# EAGLE board object_0 (EAGLE 9.0.0)
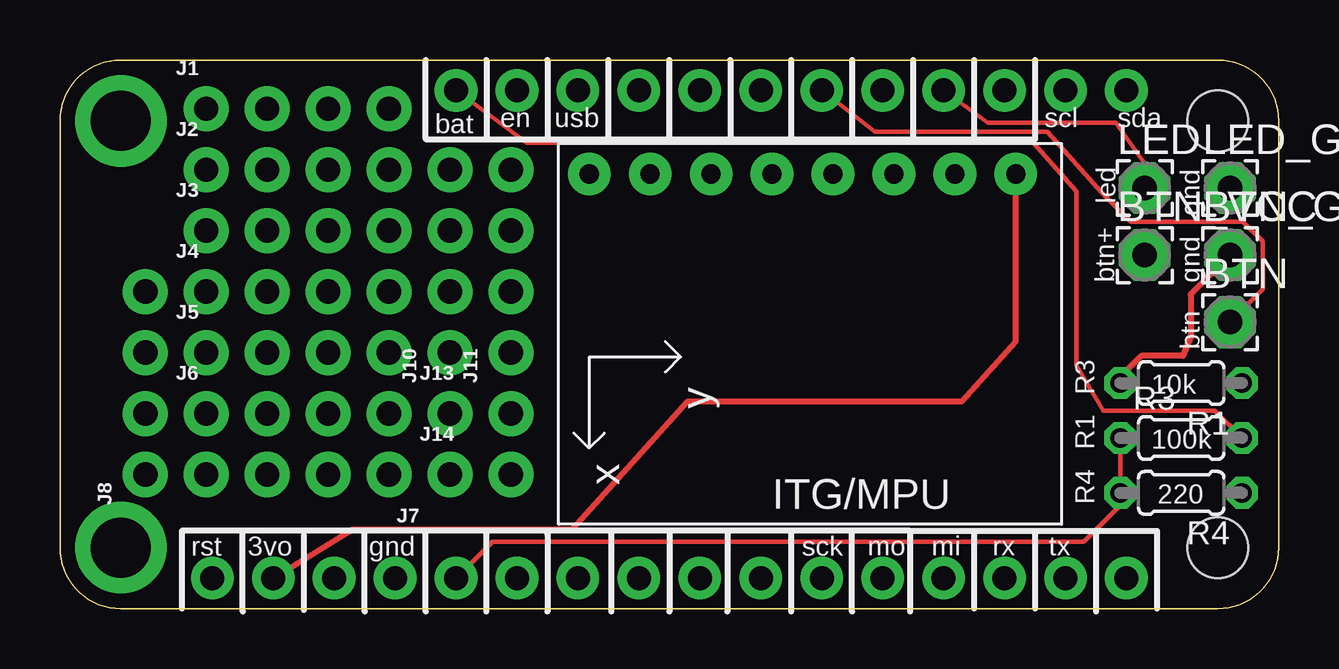
[diagram p0: board, top side]
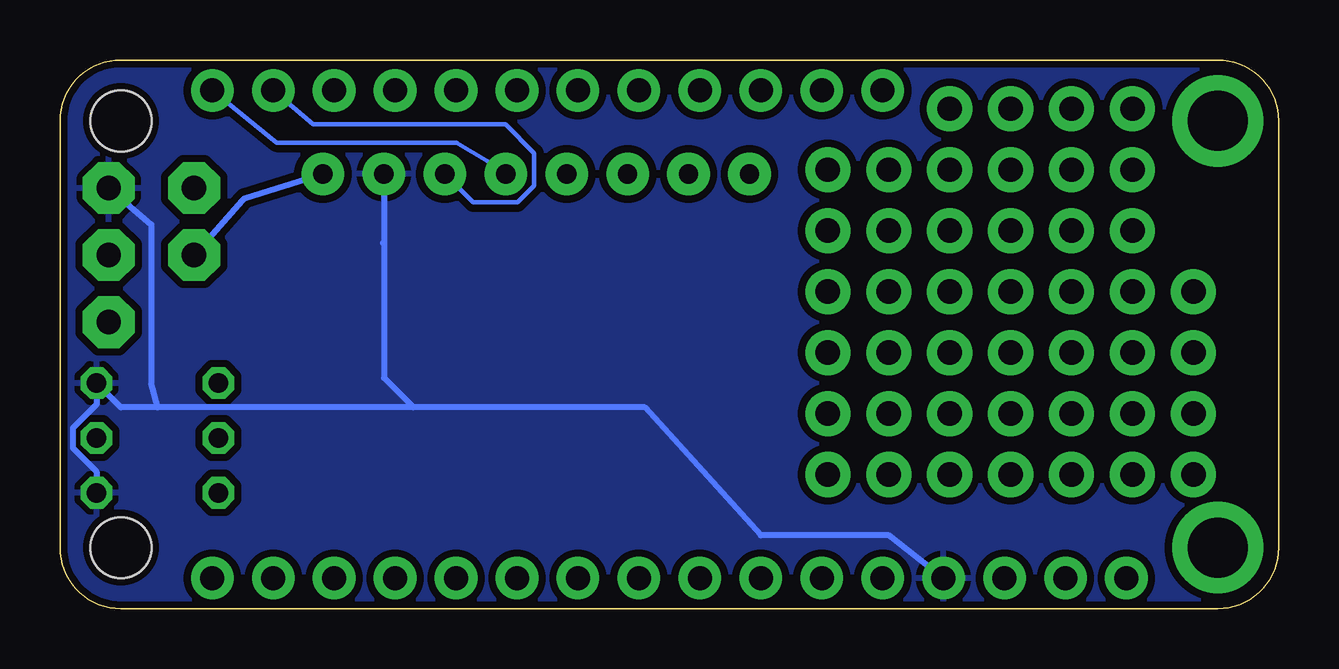
[diagram p1: board, bottom side, seen from below]

Size 50.8 x 22.86 mm. Coordinates in mm from the lower left corner, seen from the top.
Outline: 2.54,22.86 48.26,22.86 arc-90 50.8,20.32 50.8,2.54 arc-90 48.26,0 2.54,0 arc-90 0,2.54 0,20.32 arc-90 2.54,22.86
Copper layers (1*16): Top 0.035mm / dielectric 1.5mm / Bottom 0.035mm
Design rules "adafruit *": minimum track width 7mil, minimum drill 0.3mm, track to track 8mil, track to pad 8mil, pad to pad 8mil, via to via 8mil, smd to smd 8mil, copper to edge 10mil, drill to drill 8mil, minimum pad ring 10mil, minimum via ring 8mil, stop-mask expansion 2mil, vias tented up to drill 20mil, thermal gap 10mil

## Footprints (pad centres in the part's own frame; a part is rotated, then mirrored left to right if it is on the bottom)
2,15/1,0 = drill 1.016 pad 2.159 octagon: 1 0,0
1X04_NO_SILK = drill 1.016 pad 1.88: 1 0,0; 2 2.54,0; 3 5.08,0; 4 7.62,0
1X02_NO_SILK = drill 1.016 pad 1.88: 1 0,0; 2 2.54,0
FEATHERWING = drill 1 pad 1.778: 1 6.35,1.27; 2 8.89,1.27; 3 11.43,1.27; 4 13.97,1.27; 5 16.51,1.27; 6 19.05,1.27; 7 21.59,1.27; 8 24.13,1.27; 9 26.67,1.27; 10 29.21,1.27; 11 31.75,1.27; 12 34.29,1.27; 13 36.83,1.27; 14 39.37,1.27; 15 41.91,1.27; 16 44.45,1.27; 17 44.45,21.59; 18 41.91,21.59; 19 39.37,21.59; 20 36.83,21.59; 21 34.29,21.59; 22 31.75,21.59; 23 29.21,21.59; 24 26.67,21.59; 25 24.13,21.59; 26 21.59,21.59; 27 19.05,21.59; 28 16.51,21.59 | drill 2.5 pad 3.81: P$1 2.54,20.32; P$2 2.54,2.54 | hole 2.54: 48.26,20.32; 48.26,2.54
0204/5 = drill 0.813 octagon: 1 -2.54,0; 2 2.54,0
GY-521 = drill 0.8 pad 1.778: ADO -10.16,-6.35; GND -10.16,6.35; INT -10.16,-8.89; SCL -10.16,3.81; SDA -10.16,1.27; VCC -10.16,8.89; XCL -10.16,-3.81; XDA -10.16,-1.27

## Placement (x,y rotation side)
BTN  [2,15/1,0]  48.77,11.94 0 top
BTN_GND  [2,15/1,0]  48.77,14.73 0 top
BTN_VCC  [2,15/1,0]  45.21,14.73 0 top
J1  [1X04_NO_SILK]  6.1,20.83 0 top
J2  [1X04_NO_SILK]  6.1,18.29 0 top
J3  [1X04_NO_SILK]  6.1,15.75 0 top
J4  [1X04_NO_SILK]  6.1,13.21 0 top
J5  [1X04_NO_SILK]  6.1,10.67 0 top
J6  [1X04_NO_SILK]  6.1,8.13 0 top
J7  [1X04_NO_SILK]  13.72,5.59 180 top
J8  [1X04_NO_SILK]  3.56,5.59 90 top
J10  [1X04_NO_SILK]  16.26,10.67 90 top
J11  [1X04_NO_SILK]  18.8,10.67 90 top
J13  [1X02_NO_SILK]  16.26,8.13 0 top
J14  [1X02_NO_SILK]  16.26,5.59 0 top
LED  [2,15/1,0]  45.21,17.53 0 top
LED_GND  [2,15/1,0]  48.77,17.53 0 top
MS1  FEATHERWING  [FEATHERWING]  0,0 0 top
R1  [0204/5]  46.74,9.4 180 top
R3  100k  [0204/5]  46.74,7.11 0 top
R4  220  [0204/5]  46.74,4.83 180 top
U1  GY-521MPU6050  [GY-521]  30.95,7.95 270 top

## Library data of the parts
BTN BTN_GND BTN_VCC LED LED_GND = wirepad
J1-J8 J10 J11 = SparkFun-Connectors; PROD_ID: CONN-09696
J13 J14 = SparkFun-Retired
MS1 = microbuilder
R1 R3 R4 = resistor
U1 = gy-521

## Nets
AD0: MS1.5 R3.1 R4.2
BTN: BTN.1 MS1.22
GND: LED_GND.1 MS1.4 R1.1 R4.1 U1.GND
GND_BTN: BTN_GND.1 R1.2
LED: LED.1 MS1.20
SCL: MS1.18 U1.SCL
SDA: MS1.17 U1.SDA
VBAT: MS1.28 R3.2
VCC: BTN_VCC.1 MS1.2 U1.VCC

## Tracks (layer width: path | path; a pad name or v marks a point on that pad's centre or on a via)
AD0
  Top 0.178: R3.1 R4.2 44.2,4.32 42.67,2.79 18.03,2.79 MS1.5
BTN
  Top 0.178: MS1.22 33.97,19.87 41.15,19.87 43.43,17.33 44.64,16.13 49.31,16.13 50.14,15.3 50.14,13.31 BTN.1
GND
  Bottom 0.254: 36.07,8.38 26.42,8.38 21.59,3.05 16.26,3.05 MS1.4 | 36.07,8.38 46.74,8.38 | 46.74,8.38 48.26,8.38 R1.1 49.28,8.51 50.27,7.52 50.27,6.7 49.28,5.71 R4.1 | 46.74,8.38 46.99,9.4 46.99,16 LED_GND.1 | 37.34,15.24 37.3,15.28 U1.GND 37.3,9.61 36.07,8.38
  pour Bottom (isolate 0.305): 0,22.86 0,0 50.8,0 50.8,22.86
GND_BTN
  Top 0.254: R1.2 44.2,9.65 45.07,10.53 46.81,10.53 47.13,11.35 47.13,13.09 BTN_GND.1
LED
  Top 0.178: MS1.20 38.67,20.25 44.01,20.25 45.21,18.54 LED.1
SCL
  Bottom 0.178: MS1.18 40.25,20.18 32.24,20.18 31.04,18.98 31.04,17.62 31.73,16.93 33.58,16.93 U1.SCL
SDA
  Bottom 0.178: MS1.17 41.77,19.42 34.27,19.42 32.98,18.64 U1.SDA
VBAT
  Top 0.178: R3.2 48.13,8.26 43.48,8.26 42.37,10.13 42.37,17.38 40.58,19.42 19.44,19.42 MS1.28
VCC
  Top 0.254: MS1.2 12.19,3.3 21.34,3.3 26.16,8.64 37.59,8.64 39.84,11.14 U1.VCC
  Bottom 0.254: BTN_VCC.1 43.18,17.02 43.1,17.1 U1.VCC

## Text on the board
tPlace: bat | en | usb | scl | sda | led | gnd | btn+ | gnd | btn | R3 | 10k | R1 | 100k | R4 | 220 | rst | 3vo | gnd | sck | mo | mi | rx | tx